# Altium PCB RFM300HEVB_V01.PcbDoc
Units mm, origin at the board's own origin, x right, y up, seen from the top; angles counter-clockwise.
Board outline 80.2 x 40.2 mm, 2 copper layers (Top Layer, Bottom Layer), stack 1.57 mm thick; 52 components, 45 nets, 215 pads, 153 vias.
Unrouted connection lines stored in the file: 54.
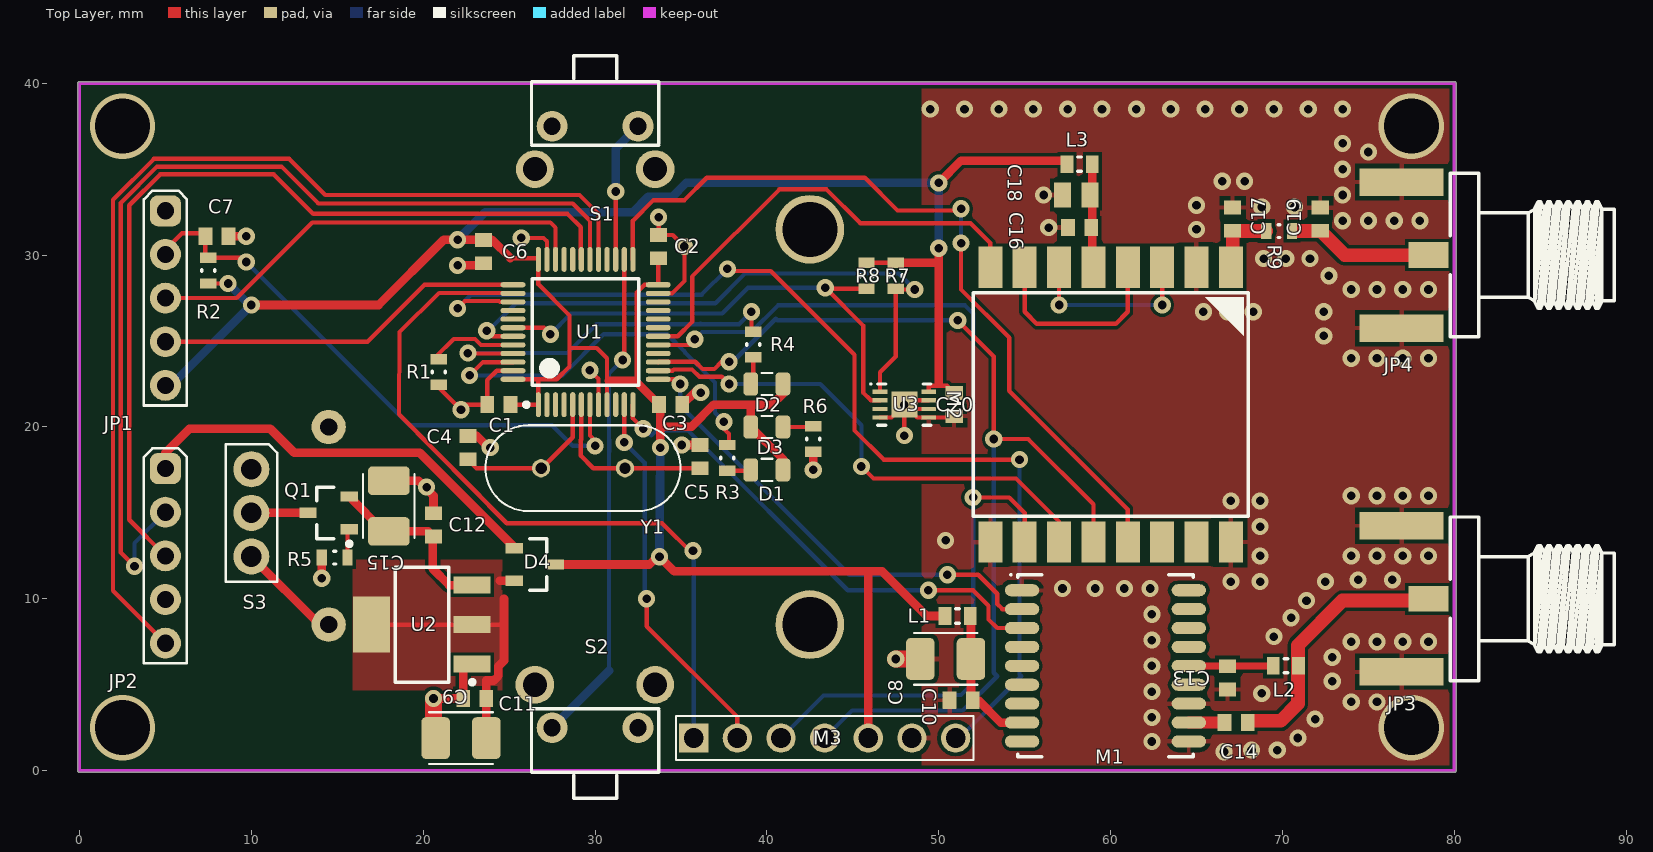
[diagram p0: Top Layer view]
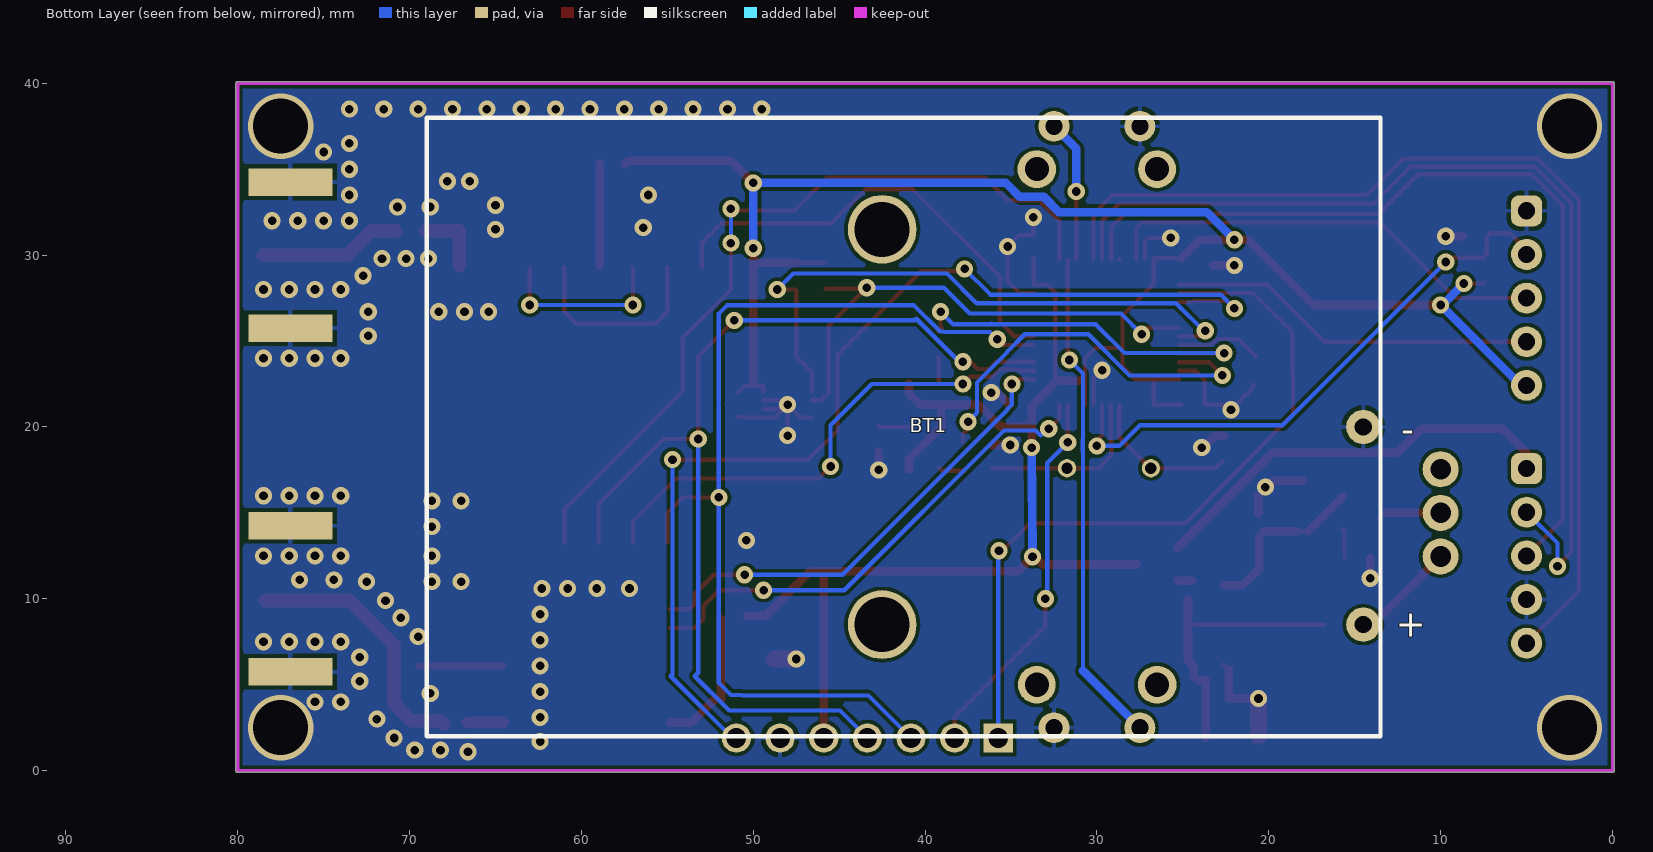
[diagram p1: Bottom Layer view, seen from below]

## Layer stack, top to bottom
Top Solder: solder mask 0.01, Solder Resist, Dk 3.5
Top Layer: signal copper 0.035
Dielectric 1: dielectric 1.5, FR-4, Dk 4.6
Bottom Layer: signal copper 0.035
Bottom Solder: solder mask 0.01, Solder Resist, Dk 3.5

## Board outline
-0.1,0 ccw(c0,0) 0,-0.1 80,-0.1 ccw(c80,0) 80.1,0 80.1,40 ccw(c80,40) 80,40.1 0,40.1 ccw(c0,40) -0.1,40

## Design rules (kind name [scope] priority, off if disabled: settings)
Clearance [All] p1: gap=0.2 ignorepadtopadclearanceinfootprint=FALSE
ComponentClearance ComponentClearance_3 [InComponent('BT1') vs InComponent('Y2')] p1: gap=0 collisioncheckmode=3 verticalgap=0 showdistances=FALSE
ComponentClearance ComponentClearance_2 [InComponent('BT1') vs InComponent('S2')] p2: gap=0 collisioncheckmode=3 verticalgap=0 showdistances=FALSE
ComponentClearance ComponentClearance_1 [InComponent('S1') vs InComponent('BT1')] p3: gap=0 collisioncheckmode=3 verticalgap=0 showdistances=FALSE
ComponentClearance [All] p4: gap=0.15 collisioncheckmode=3 verticalgap=0.15 showdistances=FALSE
HoleSize [All] p1: absolutevalues=TRUE maxlimit=5 minlimit=0.025 maxpercent=80.000 minpercent=20.000
MinimumSolderMaskSliver [All] p1: minsoldermaskwidth=0
PolygonConnect PolygonConnect_2 [InComponent('U2') vs IsNamedPolygon('3V3')] p1: connectstyle=Direct reliefconductorwidth=0.254 reliefentries=4 polygonreliefangle="90 Angle" airgapwidth=0.254
PolygonConnect PolygonConnect_1 [IsVia vs IsNamedPolygon('GND_T_RF') Or  IsNamedPolygon('GND_B1')] p2: connectstyle=Direct reliefconductorwidth=0.254 reliefentries=4 polygonreliefangle="90 Angle" airgapwidth=0.254
PolygonConnect [All] p3: connectstyle=Relief reliefconductorwidth=0.254 reliefentries=4 polygonreliefangle="90 Angle" airgapwidth=0.254
RoutingVias [All] p1: holewidth=0.711 width=1.27 viastyle="Through Hole" minholewidth=0.711 minwidth=1.27 maxholewidth=0.711 maxwidth=1.27
SilkToSilkClearance [All] p1: silktosilkclearance=0.02
SilkToSolderMaskClearance [IsPad] p1: minsilkscreentomaskgap=0.02 clearancetoexposedcopper=TRUE
SolderMaskExpansion [All] p1: expansion=0.102
Width [All] p1: maxlimit=3 minlimit=0.2 preferedwidth=0.25
25 further rules are at their usual default settings.

## Components (designator, comment, footprint, x,y, rotation, side; value= is the part's Value field where it differs from the comment)
BT1 "Battery" 3AAAHOLDER 42.5,20 r180 bottom locked
C1 "100n" C-0603 24.4,21.3 r180 top
C2 "100n" C-0603 33.7,30.5 r90 top
C3 "100n" C-0603 34.4,21.3 r0 top
C4 "22p" C-0603 22.6,18.8 r270 top
C5 "22p" C-0603 36.1,18.275 r270 top
C6 "100n" C-0603 23.5,30.2 r270 top
C7 "nc" C-0603 8,31.1 r0 top
C8 "CAPP" C-TANTAL-B 50.4,6.5 r180 top
C9 "CAPP" C-TANTAL-B 22.2,1.9 r180 top
C10 "100n" C-0603 51.3,4.1 r180 top
C11 "100n" C-0603 23,4.2 r180 top
C12 "100n" C-0603 20.6,14.3 r90 top
C13 "nc" C-0603 66.8,5.4 r90 top
C14 "27p" C-0603 67.3,2.8 r0 top
C15 "CAPP" C-TANTAL-B 18,15.4 r90 top
C16 "100n" C-0603 58.2,31.6 r180 top
C17 "nc" C-0603 67.1,32.1 r90 top
C18 "4u7" C-0805 58,33.5 r180 top
C19 "nc" C-0603 72.2,32.1 r90 top
C20 "100n" C-0603 50.9,21.3 r270 top
D1 "GREEN" LED_0805 40,17.5 r0 top
D2 "RED" LED_0805 40,22.5 r0 top
D3 "GREEN" LED_0805 40,20 r180 top
D4 "BAV99" SOT23 26.5,12 r0 top
JP1 "Header 5" PLS1-5R 5,27.5 r270 top
JP2 "Header 5" PLS1-5R 5,12.5 r270 top
JP3 "SMA" AMPHENOL_132357-11 78.5,10 r180 top
JP4 "SMA" AMPHENOL_132357-11 78.5,30 r180 top
L1 "BLM18AG601" L-0603 51.1,9 r0 top
L2 "nc" L-0603 70.2,6.1 r0 top
L3 "BLM18AG601" L-0603 58.2,35.3 r0 top
M1 "SIM28ML" LGA18_GNSS 59.7,6.1 r0 top
M2 "RFM300H" LGA16C200P2X8_1600X1600X200 60,21.3 r270 top
M3 "ECMA0896-1" PLS1-7 35.74,1.9 r0 top
Q1 "IRLML6402" SOT-23 14.5,15 r180 top
R1 "nc" R-0603 20.9,23.2 r90 top
R2 "nc" R-0603 7.5,29.1 r270 top
R3 "200" R-0603 37.7,18.2 r90 top
R4 "200" R-0603 39.2,24.8 r90 top
R5 "0" R-0603 14.85,12.4 r0 top
R6 "1k" R-0603 42.7,19.3 r270 top
R7 "4k7" R-0603 47.5,28.8 r90 top
R8 "4k7" R-0603 45.8,28.8 r90 top
R9 "0" R-0603 69.8,31.4 r0 top
S1 "KLS7" KLS7-TS3602 30,37.5 r180 top locked
S2 "KLS7" KLS7-TS3602 30,2.5 r0 top locked
S3 "SW-SPDT" SPDT_100mil 10,15 r270 top locked
U1 "STM32L151C8T6A" LQFP-48 29.45,25.525 r90 top locked
U2 "LD1117-3.3" SOT230P700X180-4N 19.925,8.5 r180 top
U3 "PCT2075TP" SOT1069-2 48,21.3 r0 top
Y1 "8MHz" HC49_3.5mm 29.3,17.6 r180 top

## Footprints (in the part's own frame and the unit in brackets; to place one, negate y for a bottom-side part, rotate by r counter-clockwise, add the part's x,y. Pads: shape width x height; smd on the part's side, far side on the other; paste and mask are expansions set on the pad)
3AAAHOLDER [mm]
  round 4 hole 3.2: 0(0,-11.5) 0(0,11.5)
  round 2 hole 1: 1(28,-11.5) 2(28,0)
  silkscreen extent -26.5,-18 29,18, body extent -26.19,-18 26.79,18, height 13
AMPHENOL_132357-11 [mm] "SMA End Launch Jack for 1.58mm PCB, 50 Ohm, Flat Tab Contact"
  rect 2.35x1.5 smd: 1(0,0)
  rect 4.9x1.6 smd: 2(1.575,4.25) 2(1.575,-4.25)
  rect 4.9x1.6 smd far side: 2(1.575,4.25) 2(1.575,-4.25)
  silkscreen extent -10.81,-4.76 -1.28,4.76, body extent -10.8,-4.76 3.48,4.76, height 4.08
C-0603 [mm] "Chip Capacitor, 2-Leads, Body 1,60x0,80mm, IPC Medium Density"
  rect 0.8x1 smd: 1(-0.675,0) 2(0.675,0)
  body extent -0.87,-0.48 0.87,0.47, height 0.85
C-0805 [mm] "Chip Capacitor, 2-Leads, Body 2,00x1,25mm, IPC Medium Density"
  rect 1x1.45 smd: 1(-0.8,0) 2(0.8,0)
  body extent -1.1,-0.72 1.1,0.72, height 1.1
C-TANTAL-B [mm] "Capacitor, Polarized, Molded Body; 3.45 mm L X 2.80 mm W X 2.10 mm H body"
  rrect30% 1.66x2.42 smd: 1(1.475,0) 2(-1.475,0)
  silkscreen extent -1.85,-1.5 1.85,1.5, body extent -1.75,-1.4 1.75,1.4, height 2.1
HC49_3.5mm [mm] "Crystal, HC-49; 4.88 mm C X 0.43 mm W 11.175 mm L X 4.75 mm T X 3.50 mm H body"
  round 1.06 hole 0.66 paste-1.06: 1(-2.44,0) 2(2.44,0)
  silkscreen extent -5.68,-2.5 5.68,2.5, body extent -5.59,-2.37 5.59,2.37, height 3.5
KLS7-TS3602 [mm] "miniature switch"
  round 1.8 hole 1: 1(-2.5,0) 2(2.5,0)
  oval 2.25x2.2 hole 1.4: 3(-3.5,2.5)
  round 2.2 hole 1.4: 3(3.5,2.5)
  silkscreen extent -3.7,-4.1 3.7,1.1, body extent -3.7,-3.97 3.6,3.75, height 4.4
L-0603 [mm] "Chip Inductor, 2-Leads, Body 1,60x0,80mm, IPC Medium Density"
  rect 0.74x1.02 smd: 1(-0.735,0) 2(0.735,0)
  silkscreen extent -0.1,-0.41 0.1,0.41, body extent -0.9,-0.5 0.9,0.5, height 1
LED_0805 [mm] "LED, Chip; 2.00 mm L X 1.25 mm W X 0.80 mm H body"
  rrect51% 0.86x1.35 smd: A(0.935,0) K(-0.935,0)
  silkscreen extent -0.33,-0.65 0.33,0.65, body extent -1,-0.63 1,0.63, height 0.25
LGA16C200P2X8_1600X1600X200 [mm] "LGA, 16-Leads, Body 16,00x16,00mmx2,00mm, Pitch 2,00mm"
  rect 2.4x1.4 smd: 1(-8,7) 2(-8,5) 3(-8,3) 4(-8,1) 5(-8,-1) 6(-8,-3) 7(-8,-5) 8(-8,-7) 9(8,-7) 10(8,-5) 11(8,-3) 12(8,-1) 13(8,1) 14(8,3) 15(8,5) 16(8,7)
  silkscreen extent -6.5,-8 6.5,8, body extent -8,-8 8,8, height 2
LGA18_GNSS [mm] "8-Leads, Body 10,10x9,70mm, Pitch 1,10mm"
  oval 2x0.7 smd mask+0.1: 1(-4.85,4.4) 2(-4.85,3.3) 3(-4.85,2.2) 4(-4.85,1.1) 5(-4.85,0) 6(-4.85,-1.1) 7(-4.85,-2.2) 8(-4.85,-3.3) 9(-4.85,-4.4) 10(4.85,-4.4) 11(4.85,-3.3) 12(4.85,-2.2) 13(4.85,-1.1) 14(4.85,0) 15(4.85,1.1) 16(4.85,2.2) 17(4.85,3.3) 18(4.85,4.4)
  silkscreen extent -5.55,-5.3 5.1,5.35, body extent -4.95,-5.15 4.95,5.15, height 2.6
LQFP-48 [mm] "TSQFP, 48-Leads, Body 7,00x7,00mm, Pitch 0,50mm, IPC Medium Density"
  oval 1.45x0.3 smd: 1(-4.225,2.75) 2(-4.225,2.25) 3(-4.225,1.75) 4(-4.225,1.25) 5(-4.225,0.75) 6(-4.225,0.25) 7(-4.225,-0.25) 8(-4.225,-0.75) 9(-4.225,-1.25) 10(-4.225,-1.75) 11(-4.225,-2.25) 12(-4.225,-2.75) 25(4.225,-2.75) 26(4.225,-2.25) 27(4.225,-1.75) 28(4.225,-1.25) 29(4.225,-0.75) 30(4.225,-0.25) 31(4.225,0.25) 32(4.225,0.75) 33(4.225,1.25) 34(4.225,1.75) 35(4.225,2.25) 36(4.225,2.75)
  oval 0.3x1.45 smd: 13(-2.75,-4.225) 14(-2.25,-4.225) 15(-1.75,-4.225) 16(-1.25,-4.225) 17(-0.75,-4.225) 18(-0.25,-4.225) 19(0.25,-4.225) 20(0.75,-4.225) 21(1.25,-4.225) 22(1.75,-4.225) 23(2.25,-4.225) 24(2.75,-4.225) 37(2.75,4.225) 38(2.25,4.225) 39(1.75,4.225) 40(1.25,4.225) 41(0.75,4.225) 42(0.25,4.225) 43(-0.25,4.225) 44(-0.75,4.225) 45(-1.25,4.225) 46(-1.75,4.225) 47(-2.25,4.225) 48(-2.75,4.225)
  silkscreen extent -4.35,-3.1 3.1,3.57, body extent -3.5,-3.5 3.5,3.5, height 1.6
PLS1-5R [mm]
  rrect50% 1.8x1.8 hole 1: 1(-5.08,0)
  round 1.8 hole 1: 2(-2.54,0) 3(0,0) 4(2.54,0) 5(5.08,0)
  silkscreen extent -6.25,-1.25 6.25,1.25, body extent -6.35,-10.03 6.35,0.32, height 2.5
PLS1-7 [mm] "Header, Vertical, 2.54 mm pitch; 0.70 mm lead width, 7 pins, 1 row, 7 pins per row, 16.51 mm L X 2.54 mm W X 7.54 mm H body"
  rect 1.71x1.71 hole 1.14 paste-1.71: 1(0,0)
  round 1.71 hole 1.14 paste-1.71: 2(2.54,0) 3(5.08,0) 4(7.62,0) 5(10.16,0) 6(12.7,0) 7(15.24,0)
  silkscreen extent -1.04,-1.27 16.28,1.27, body extent -0.64,-1.27 15.88,1.27, height 7.54
R-0603 [mm] "Chip Resistor, 2-Leads, Body 1,60x0,82mm, IPC Medium Density"
  rect 0.6x0.95 smd: 1(-0.75,0) 2(0.75,0)
  silkscreen extent -0.05,-0.38 0.05,0.38, body extent -0.85,-0.48 0.85,0.48, height 0.6
SOT23 [mm] "SOT23, 3-Leads, Body 2,90x2,45mm, Pitch 0,95mm, IPC Medium Density"
  rect 1x0.6 smd: 1(-1.2,0.95) 2(-1.2,-0.95) 3(1.2,0)
  silkscreen extent -0.3,-1.5 0.7,1.5, body extent -1.25,-1.5 1.25,1.5, height 1.2
SOT230P700X180-4N [mm] "SOT223, 4-Leads, Body 6,50x7,00mm (avg), Pitch 2,30mm, IPC Medium Density"
  rect 2.15x1 smd: 1(-2.925,2.3) 2(-2.925,0) 3(-2.925,-2.3)
  rect 2.15x3.25 smd: 2(2.925,0)
  silkscreen extent -3.05,-3.35 1.55,3.47, body extent -1.85,-3.35 1.85,3.35, height 1.8
SOT1069-2 [mm] "8-lead DFN 2*3mm"
  rect 0.85x0.25 smd: 1(-1.42,0.75) 2(-1.42,0.25) 3(-1.42,-0.25) 4(-1.42,-0.75) 5(1.42,-0.75) 6(1.42,-0.25) 7(1.42,0.25) 8(1.42,0.75)
  rect 1.5x1.5 smd: 9(0,0)
  silkscreen extent -2,-1.2 1.55,1.25, body extent -1.55,-1.05 1.55,1.05, height 0.8
SOT-23 [mm] "SOT23, 3-Leads, Body 2,90x2,45mm, Pitch 0,95mm, IPC Medium Density"
  rect 1x0.6 smd: 1(-1.2,0.95) 2(-1.2,-0.95) 3(1.2,0)
  silkscreen extent -1.33,-1.5 0.7,1.92, body extent -0.7,-1.5 0.7,1.5, height 1.1
SPDT_100mil [mm]
  round 2.1 hole 1.2: 1(-2.54,0) 2(0,0) 3(2.54,0)
  silkscreen extent -4,-1.5 4,1.5, body extent -4.3,-1.88 4.29,1.89, height 6.34

## Part data
BT1: "Multicell Battery", LatestRevisionDate=17-Jul-2002, LatestRevisionNote="Re-released for DXP Platform.", PackageDescription="Battery; 2 Leads", PackageReference=BAT-2, Published=24-Mar-1999, Publisher="Altium Limited"
C1 C2 C3 C4 C5 C6 C7 C10 C11 C12 C13 C14 C16 C17 C18 C19 C20: library part CAPN
D1 D2 D3: library part DLED
D4: "High-speed switching diodes 0.215 AMPERES, 100 VOLTS, Cjmax=2pF, SOT-23", Name=BAV99, Корпус=SOT23, Номінал=BAV99, Позиційне позначення на платі==Designator
JP1 JP2: "Header, 5-Pin", LatestRevisionDate=17-Jul-2002, LatestRevisionNote="Re-released for DXP Platform.", Publisher="Altium Limited"
JP3 JP4: library part X-004, "RF Connector"
L1 L3: library part SUPRESOR
L2: library part L
M3: library part ECMA0896
R1 R2 R3 R4 R5 R6 R7 R8 R9: library part RES
S1 S2: library part SW-1, Вид=Кнопка, Корпус==Footprint, Тип=KLS7
S3: "SPDT Subminiature Toggle Switch, Right Angle Mounting, Vertical Actuation", ComponentLink1Description="Manufacturer Link", ComponentLink1URL=http://www.apem.com, DatasheetVersion=05-Dec-2000, LatestRevisionDate=17-Dec-2003, LatestRevisionNote="Schematic revised, PCB Footprint replaced.", PackageDescription="Switch; 4 Leads", PackageReference=TL36WW15050, Published=24-Mar-1999, Publisher="Altium Limited"
U1: library part STM32L151C8T6
U2: library part LM1117_3.3, Вид=Мікросхема, Корпус==Footprint, Тип=LD1117-3.3
U3: library part TMP75, Part Field 1=NXP, Part Field 6="I2C Digital temperature sensor"
Y1: library part XTAL, "Crystal Oscillator", LatestRevisionDate=17-Jul-2002, LatestRevisionNote="Re-released for DXP Platform.", PackageDescription="Crystal, Thru-Hole; 2 Leads; Body 3.1 x 8.2 mm (Dia.xH)", PackageReference=R38, Published=8-Jun-2000, Publisher="Altium Limited"

## Via types
v1: diameter 1, hole 0.5, Top Layer to Bottom Layer, 149 vias
v2: diameter 3.8, hole 3.2, Top Layer to Bottom Layer, 4 vias

## Nets (pads, with @x,y where several pads share a name; then routed paths per layer and width w, separated by ;. In a path a pad name is that pad's centre, name@x,y a point inside that pad or via, vN(x,y) a via of type N, cw(c..) or ccw(c..) an arc to the next point about the centre after c; other vN are vias at no path point)
+3V3: C9.2 C11.1 D4.2 U2.2 | length 17.6
  Top Layer w0.25: U2.2@16.775,8.5 17,8.5 22.85,8.5 24.7,8.5
  Top Layer w0.5: C9.2 C11.1 23.675,5.25 24.111,5.25 24.375,5.514 24.375,6.075 24.7,6.4 24.7,8.5 24.7,10 ; 24.45,11.05 D4.2
+3V3EXT: D4.1 JP2.1 | length 24.7
  Top Layer w0.5: JP2.1 5,18.5 6.4,19.9 11.1,19.9 12.5,18.5 19.8,18.5 D4.1@25.325,12.975
+4V5: C12.1 C15.2 Q1.2 U2.3 | length 9.8
  Top Layer w0.25: C15.2@17.725,13.925 C15.2 C15.2@18.35,13.925
  Top Layer w0.5: Q1.2 C15.2@17.725,13.925 ; C15.2@18.35,13.925 C12.1@20.3,13.925 ; C12.1@20.55,13.6 20.55,11.75 21.5,10.8 U2.3@22.625,10.8
A0: M3.1 U1.38 | length 43.7
  Top Layer w0.25: U1.38 20.927,27.799 18.624,25.522 18.597,20.74 24.865,14.4 33.9,14.4 v1@35.7,12.6
  Bottom Layer w0.25: v1(35.7,12.8) 35.74,12.76 M3.1
CS_FIFO: M2.13 U1.25 | length 46.6
  Top Layer w0.25: U1.25 32.2,32 33.4,33.2 35.2,33.2 36.5,34.5 45.7,34.5 47.6,32.6 v1@51.3,32.6 ; v1(51.3,30.7) 51.3,28 54.1,25.2 54.1,22.1 61,15.2 M2.13
  Bottom Layer w0.25: v1(51.3,30.7) v1(51.3,32.7)
CS_LCD: M3.2 U1.11 | length 22.2
  Top Layer w0.25: v1(31.7,19.1) U1.11 ; v1(33,10) 33,8.4 38.28,3.12 M3.2
  Bottom Layer w0.25: v1(31.7,19.1) 32.889,17.911 v1@32.889,9.911
CS_RF: M2.11 U1.14 | length 29.6
  Top Layer w0.25: U1.14 34.508,23.275 34.583,23.35 35.647,23.35 36.072,22.925 37.375,22.925 v1(37.8,22.5) ; v1(45.5,17.7) 46.2,17 54.5,17 57,14.5 M2.11
  Bottom Layer w0.25: v1(37.8,22.5) 43.1,22.5 45.5,20.1 v1(45.5,17.7)
DIO0: M2.8 U1.18 | length 27.1
  Top Layer w0.25: U1.18 34.808,25.275 35.65,26.117 35.65,28.75 40.725,33.825 43.463,33.825 45.438,31.85 51.85,31.85 53,30.7 M2.8
GND: BT1.2 C1.2 C2.2 C3.2 C4.1 C5.1 C6.2 C7.2 C8.1 C9.1 C10.2 C11.2 C12.2 C13.1 C15.1 C16.2 C17.2 C18.2 C19.2 C20.2 JP1.1 JP2.4 JP3.2 JP4.2 M1.1 M1.10 M1.12 M2.2 M2.9 M2.16 M3.6 R1.1 R5.1 R6.2 S1.2 S2.2 U1.8 U1.23 U1.35 U1.47 U2.1 U3.4 U3.5 U3.6 U3.7 U3.9 | length 47.4
  Top Layer w0.25: C9.1@20.6,2.025 C9.1 ; R1.1 20.9,22.3 v1(22.2,21) ; v1(22,29.4) 22,29.15 v1@22.25,29.4 ; v1@22.3,21.3 C1.2 23.725,22.725 24.275,23.275 U1.47 ; U2.1@22.325,5.9 U2.1@22.625,6.2 ; v1(25.7,31) 27,31 27.2,30.8 U1.35 ; v1(29.7,23.3) 30.2,22.8 U1.8 ; U1.23 34.475,27.775 35.2,28.5 v1(35.2,30.5) 34.525,31.175 C2.2 v1(33.7,32.2) ; U3.4 47.25,20.55 v1(48,21.3) ; v1(48,19.5) 48,20.95 U3.9@48.1,21.05 ; U3.6 U3.9@48.25,21.05 ; U3.7 48.25,21.55 v1(48,21.3) ; C20.2 50.825,20.55 U3.5 48.75,20.55 U3.9@48.25,21.05 ; v1(48,21.3) U3.9@48.25,21.05
  Top Layer w0.5: C7.2 v1(9.7,31.1) ; v1(14.1,11.2) R5.1 ; C15.1 19.725,16.875 20.6,16 C12.2 ; v1(20.6,4.2) C11.2 U2.1@22.325,5.9 ; v1@22.25,29.4 C6.2@23.225,29.4 ; C4.1@22.6,19.5 23.1,19.5 v1@23.65,18.95 ; v1(35.05,18.95) C5.1 ; C3.2 35.093,21.3 35.893,22.1 35.993,22 v1(36.15,22) ; v1(42.7,17.5) R6.2
  Top Layer w1: C9.1@20.6,2.025 v1(20.6,4.2) ; v1(47.5,6.5) C8.1@48.8,6.5
  other v1: 66.6,1.1 68.2,1.2 69.7,1.2 62.4,1.7 70.9,1.9 71.9,3 62.4,3.1 74,4 75.5,4 68.8,4.5 62.4,4.6 72.9,5.2 62.4,6.1 72.9,6.6 74,7.5 75.5,7.5 77,7.5 78.5,7.5 62.4,7.6 69.5,7.8 70.5,8.9 62.4,9.1 71.4,9.9 57.2,10.6 59.1,10.6 60.8,10.6 62.3,10.6 67,11 68.7,11 72.5,11 74.4,11.1 76.4,11.1 68.7,12.5 74,12.5 75.5,12.5 77,12.5 78.5,12.5 50.4,13.4 68.7,14.2 67,15.7 68.7,15.7 74,16 75.5,16 77,16 78.5,16 20.2,16.5 23.9,18.8 74,24 75.5,24 77,24 78.5,24 72.4,25.3 65.4,26.7 66.8,26.7 68.3,26.7 72.4,26.7 74,28 75.5,28 77,28 78.5,28 72.7,28.8 68.9,29.8 70.2,29.8 71.6,29.8 65,31.5 56.4,31.6 73.5,32 75,32 76.5,32 78,32 68.8,32.8 70.7,32.8 65,32.9 56.1,33.5 73.5,33.5 66.5,34.3 67.8,34.3 73.5,35 75,36 73.5,36.5 49.5,38.5 51.5,38.5 53.5,38.5 55.5,38.5 57.5,38.5 59.5,38.5 61.5,38.5 63.5,38.5 65.5,38.5 67.5,38.5 69.5,38.5 71.5,38.5 73.5,38.5
  other v2: 2.5,2.5 77.5,2.5 2.5,37.5 77.5,37.5
GREEN: R3.2 U1.46 | length 23.1
  Top Layer w0.25: v1@22.7,22.9 v1(22.7,23) 23.475,23.775 U1.46 ; v1(37.5,20.3) 37.5,19.9 37.8,19.6 R3.2@37.8,19.1
  Bottom Layer w0.25: v1(22.7,23) 28.1,23 30.5,25.4 34.2,25.4 35.2,24.4 ; 35.242,24.325 36.975,22.592 36.975,20.825 v1(37.5,20.3)
K0: S2.1 U1.26 | length 29
  Top Layer w0.25: v1(31.6,23.9) 31.7,24 U1.26
  Bottom Layer w0.254: 30.813,5.813 30.813,18.543 30.827,18.557 30.827,19.243 30.813,19.257 30.813,23.113 v1(31.6,23.9)
  Bottom Layer w0.5: S2.1 30.813,5.813
K1: S1.1 U1.27 | length 8.3
  Top Layer w0.25: U1.27 v1(31.2,33.7)
  Bottom Layer w0.5: v1(31.2,33.7) 31.2,36.2 S1.1
LCDRST: M3.7 U1.39 | length 62.2
  Top Layer w0.25: v1(22,26.9) 22.425,27.325 24.415,27.325 24.465,27.275 U1.39 ; v1(37.7,29.2) 37.825,29.075 40.225,29.075 45.1,24.2 45.1,19.8 46.8,18.1 v1(54.7,18.1)
  Bottom Layer w0.25: v1(22,26.9) 22.8,27.7 36.2,27.7 v1(37.7,29.2) ; M3.7 51.2,1.9 54.8,5.5 54.7,5.6 v1(54.7,18.1)
MOSI: M2.10 M3.3 U1.17 | length 58.5
  Top Layer w0.25: U1.17 35.475,24.775 v1(35.8,25.1) ; v1(52,15.9) 54.1,15.9 55,15 M2.10
  Bottom Layer w0.25: M3.3 43.295,4.375 50.642,4.375 50.667,4.4 51.3,4.4 52,5.1 52,21.3
  Bottom Layer w0.254: v1(35.8,25.1) 36.223,25.523 38.881,25.523 38.912,25.554 39.124,25.554 40.643,27.073 51.527,27.073 52,26.6 52,21.4
NetBT1_1: BT1.1 S3.3 | length 6.1
  Top Layer w0.5: S3.3 13.96,8.5 BT1.1
NetC4_2: C4.2 U1.5 Y1.2 | length 8.8
  Top Layer w0.25: C4.2@22.7,18 23.1,17.6 Y1.2 26.9,17.6 28.7,19.4 U1.5
NetC5_2: C5.2 U1.6 Y1.1 | length 10.2
  Top Layer w0.25: U1.6 29.2,19.267 29.175,19.242 29.175,18.325 29.9,17.6 Y1.1 C5.2
NetC8_2: C8.2 C10.1 L1.2 M1.8 | length 8.2
  Top Layer w0.25: C10.1@51.875,4.2 C10.1 C10.1@52.3,4.1
  Top Layer w0.5: C10.1@51.875,4.2 C8.2 L1.2@51.875,8.8 ; C10.1@52.3,4.1 53.6,2.8 M1.8
NetC13_2: C13.2 L2.1 M1.14 | length 4.9
  Top Layer w0.4: M1.14 L2.1
NetC14_1: C14.1 M1.11 | length 2.1
  Top Layer w0.7: M1.11 C14.1
NetC14_2: C14.2 JP3.1 L2.2 | length 15.4
  Top Layer w0.8: C14.2@68,2.7 68.2,2.9 69.9,2.9 70.9,3.9 70.9,7.3 73.5,9.9 JP3.1@78.4,9.9
NetC16_1: C16.1 C18.1 L3.2 M2.5 | length 6
  Top Layer w0.25: M2.5@58.935,29.365 M2.5
  Top Layer w0.5: M2.5@58.935,29.365 L3.2
NetC17_1: C17.1 M2.1 R9.1 | length 4.1
  Top Layer w0.25: M2.1 M2.1@67.1,29.4 ; C17.1 C17.1@67.125,31.4
  Top Layer w0.8: M2.1@67.1,29.4 C17.1 ; C17.1@67.125,31.4 R9.1
NetC19_1: C19.1 JP4.1 R9.2 | length 8.3
  Top Layer w0.8: R9.2@70.8,31.4 72.225,31.4 73.625,30 JP4.1
NetD1_K: D1.K R3.1 | length 1.6
  Top Layer w0.25: R3.1 39.015,17.45 D1.K D1.K@39.2,17.635
NetD2_K: D2.K R4.1 | length 1.6
  Top Layer w0.25: D2.K 39.2,22.635 R4.1
NetD3_K: D3.K R6.1 | length 1.8
  Top Layer w0.25: D3.K 42.65,20 R6.1
NetM2_3: M2.3 M2.6 | length 10.4
  Top Layer w0.25: v1(57,27.1) M2.6 ; v1(63,27.1) M2.3
  Bottom Layer w0.25: v1(57,27.1) v1(63,27.1)
NetM2_4: M2.4 M2.7 | length 11.8
  Top Layer w0.25: M2.7 55,26.7 55.7,26 60.3,26 61,26.7 M2.4
NetQ1_1: Q1.1 R5.2 | length 1.7
  Top Layer w0.25: R5.2 15.6,13.95 Q1.1
NetQ1_3: Q1.3 S3.2 | length 3.3
  Top Layer w0.25: Q1.3@13.2,15 Q1.3@13.3,14.9
  Top Layer w0.5: S3.2 Q1.3@13.2,15
NetR1_2: R1.2 U1.44 | length 5
  Top Layer w0.25: R1.2@20.75,24.1 21.775,25.125 23.008,25.125 23.358,24.775 U1.44
NRST: C7.1 JP1.2 R2.1 U1.7 | length 33.9
  Top Layer w0.25: JP1.2@4.6,29.9 5.97,31.27 C7.1@7.155,31.27 ; C7.1 7.325,30.025 R2.1 9.35,29.85 v1@9.5,29.7 ; v1(9.7,29.6) v1@9.7,29.933 ; U1.7 29.7,19.5 v1@30.1,19.1
  Bottom Layer w0.25: v1(9.7,29.6) 19.2,20.1 27.5,20.1 28.7,18.9 v1(30,18.9)
PRG: JP2.5 U1.29 | length 60.3
  Top Layer w0.25: JP2.5 1.95,10.47 1.95,33.223 4.327,35.6 12.2,35.6 14.3,33.5 29.1,33.5 30.2,32.4 U1.29
RED: R4.2 U1.45 | length 21.3
  Top Layer w0.25: v1@22.536,24.3 v1(22.6,24.3) 22.625,24.275 U1.45 ; v1(39.1,26.7) 39.1,25.8 39.025,25.725 R4.2
  Bottom Layer w0.25: v1@23.05,24.3 28.4,24.3 30.075,25.975 36.108,25.975 36.133,26 36.158,25.975 38.375,25.975 v1(39.1,26.7)
  Bottom Layer w0.254: v1(39.1,26.7) v1@39.1,27
RXD1: JP2.3 U1.31 | length 51.4
  Top Layer w0.25: JP2.3 2.9,14.6 2.9,32.9 4.7,34.7 11.3,34.7 13.6,32.4 28.4,32.4 29.175,31.625 29.175,29.775 U1.31
RXD2: M1.2 U1.13 | length 27.8
  Top Layer w0.25: U1.13 34.7,22.775 34.7,22.75 v1(34.95,22.5) ; v1(50.5,11.4) 52.3,11.4 53.4,10.3 53.4,9.7 53.7,9.4 M1.2
  Bottom Layer w0.25: v1(34.95,22.5) 34.95,21.3 35.225,21.025 35.2,21 39.1,17.1 44.8,11.4 v1(50.5,11.4)
SCK: M2.12 M3.4 U1.15 | length 62
  Top Layer w0.25: U1.15 33.7,23.8 35.833,23.8 36.258,23.375 36.942,23.375 37.367,23.8 v1(37.8,23.8) ; v1(51.1,26.2) 53.2,24.1 v1(53.2,19.3) ; v1@53.483,19.017 v1(53.2,19.3) ; M2.12 59,15.5 55.2,19.3 v1(53.2,19.3)
  Bottom Layer w0.25: M3.4 44.96,3.5 51.4,3.5 53.4,5.5 53.2,5.7 v1(53.2,19.3)
  Bottom Layer w0.254: v1(37.8,23.8) 38.012,23.8 40.512,26.3 40.612,26.2 v1(51.1,26.2)
SCL: R8.1 U1.42 U3.2 | length 30
  Top Layer w0.25: U1.42 27.025,25.775 v1(27.4,25.4) ; v1(43.4,28.1) v1@43.45,28.05 ; R8.1 v1@43.45,28.05 ; U3.2 46.05,21.55 45.6,22 45.6,25.9 v1@43.45,28.05
  Bottom Layer w0.25: v1(27.4,25.4) 28.6,26.6 37.4,26.6 38.9,28.1 v1(43.4,28.1)
SDA: R7.1 U1.43 U3.1 | length 35.8
  Top Layer w0.25: v1(23.7,25.6) 24.025,25.275 U1.43 ; U3.1 46.58,23.18 47.5,24.1 47.5,27.95 47.55,28 v1(48.6,28)
  Bottom Layer w0.25: v1@23.7,25.5 23.75,25.55 25.4,27.2 37,27.2 38.725,28.925 47.675,28.925 v1(48.6,28)
SWCLK: JP1.4 U1.37 | length 21.6
  Top Layer w0.25: JP1.4 16.76,24.96 20.075,28.275 U1.37
SWDIO: JP1.3 U1.34 | length 26.5
  Top Layer w0.25: JP1.3 9.149,27.5 13.549,31.9 27.4,31.9 27.7,31.6 U1.34
TXD1: JP2.2 U1.30 | length 57.1
  Top Layer w0.25: v1(3.2,11.9) 2.4,12.7 2.4,33.036 4.514,35.15 11.75,35.15 13.9,33 28.7,33 29.7,32 U1.30
  Bottom Layer w0.25: v1(3.2,11.9) 3.2,13.24 JP2.2
TXD2: M1.3 U1.12 | length 29.2
  Top Layer w0.25: U1.12 32.2,20.5 v1(32.8,19.9) ; v1(49.4,10.5) 52,10.5 52.9,9.6 52.9,8.8 53.4,8.3 M1.3
  Bottom Layer w0.25: v1(32.8,19.9) 32.867,19.9 33.267,19.5 33.567,19.8 35.4,19.8 44.7,10.5 v1(49.4,10.5)
VCC: C1.1 C2.1 C3.1 C6.1 C20.1 D1.A D2.A D3.A D4.3 JP1.5 L1.1 L3.1 M3.5 R2.2 R7.2 R8.2 U1.1 U1.9 U1.24 U1.36 U1.48 U3.8 | length 170.1
  Top Layer w0.25: R2.2 v1(8.65,28.35) ; C1.1 U1.1 26.7,22.775 ; 25.075,29.825 U1.36@26.7,29.825 ; U1.48 26.7,22.775 ; U1.36 26.7,28.3 28.513,26.487 28.513,23.513 27.775,22.775 26.7,22.775 ; 28.513,24.6 30.1,24.6 30.7,24 U1.9 ; 32.425,22.625 32.425,27.825 32.875,28.275 U1.24 33.675,29.8 C2.1 ; R8.2 R7.2 ; U3.8 49.42,22.38 49.44,22.4 50.475,22.4 C20.1
  Top Layer w0.5: v1@10,27.2 v1(10,27.1) 17.4,27.1 21.2,30.9 v1(22,30.9) 24,30.9 25.075,29.825 ; D4.3 33.165,12 33.615,12.45 v1(33.75,12.45) 34.6,11.6 45.9,11.6 ; 30.8,22.7 32.325,22.7 C3.1 33.8,21.225 33.8,20.012 ; v1(33.8,18.8) 33.8,20.012 ; 39.065,21.1 D3.A 40.935,18.13 D1.A ; D2.A 40.935,21.935 40.3,21.3 36.9,21.3 35.612,20.012 33.8,20.012 ; M3.5 45.9,11.6 ; R7.2 50,29.55 ; 50,22.6 v1(50,30.4) ; v1(50,34.2) 51.3,35.5 57.265,35.5 L3.1 ; L1.1 49.3,9 46.7,11.6 45.9,11.6
  Bottom Layer w0.25: JP1.5 JP1.5@5.32,22.42 ; v1@9.9,27.1 v1(10,27.1)
  Bottom Layer w0.5: JP1.5@5.32,22.42 v1(10,27.1) ; v1(8.65,28.35) v1@9.9,27.1 ; v1(22,30.9) 23.6,32.5 32.2,32.5 33.1,33.4 34.5,33.4 35.3,34.2 v1(50,34.2) v1@50,30.6 ; v1(33.75,12.45) v1(33.8,18.8)
pads on no net: BT1.0 M1.4 M1.5 M1.6 M1.7 M1.9 M1.13 M1.15 M1.16 M1.17 M1.18 M2.14 M2.15 S1.3 S2.3 S3.1 U1.2 U1.3 U1.4 U1.10 U1.16 U1.19 U1.20 U1.21 U1.22 U1.28 U1.32 U1.33 U1.40 U1.41 U3.3
copper on no net: | length 0
  Top Layer w0.25: 28.675,29.775 28.7,29.75

## Polygon pours and split planes (outlines as drawn)
GND on Bottom Layer "GND_B1" (solid, remove dead copper, pour order 0): 0,0 80,0 80,40 0,40
+3V3 on Top Layer "3V3" (solid, remove dead copper, pour order 4): 15.9,12.288 24.6,12.288 24.6,5.188 24.6,4.688 15.9,4.688
GND on Top Layer "GND_T_RF" (solid, remove dead copper, pour order 2): 49,40 49,0 80,0 80,40

## Keep-outs
Keep-Out Layer:
  lines w0.2: 0,0 80,0 80,40 0,40 0,0

## Silkscreen, mask and mechanical layers (free items; w line width, h text height)
Mechanical 1:
  lines w0.15: 53,0 53,40

## Text inside footprints (layer, text, board x,y; h text height)
BT1: Bottom Overlay "+" at 12.6,7.8 h1.52; Bottom Overlay "-" at 12.3,19.1 h1.52